# Altium PCB uOpioid - rev.B0.PcbDoc
Units mm, origin at the board's own origin, x right, y up, seen from the top; angles counter-clockwise.
Board outline 20 x 49.8 mm, 2 copper layers (Top Layer, Bottom Layer); 39 components, 38 nets, 136 pads, 78 vias.
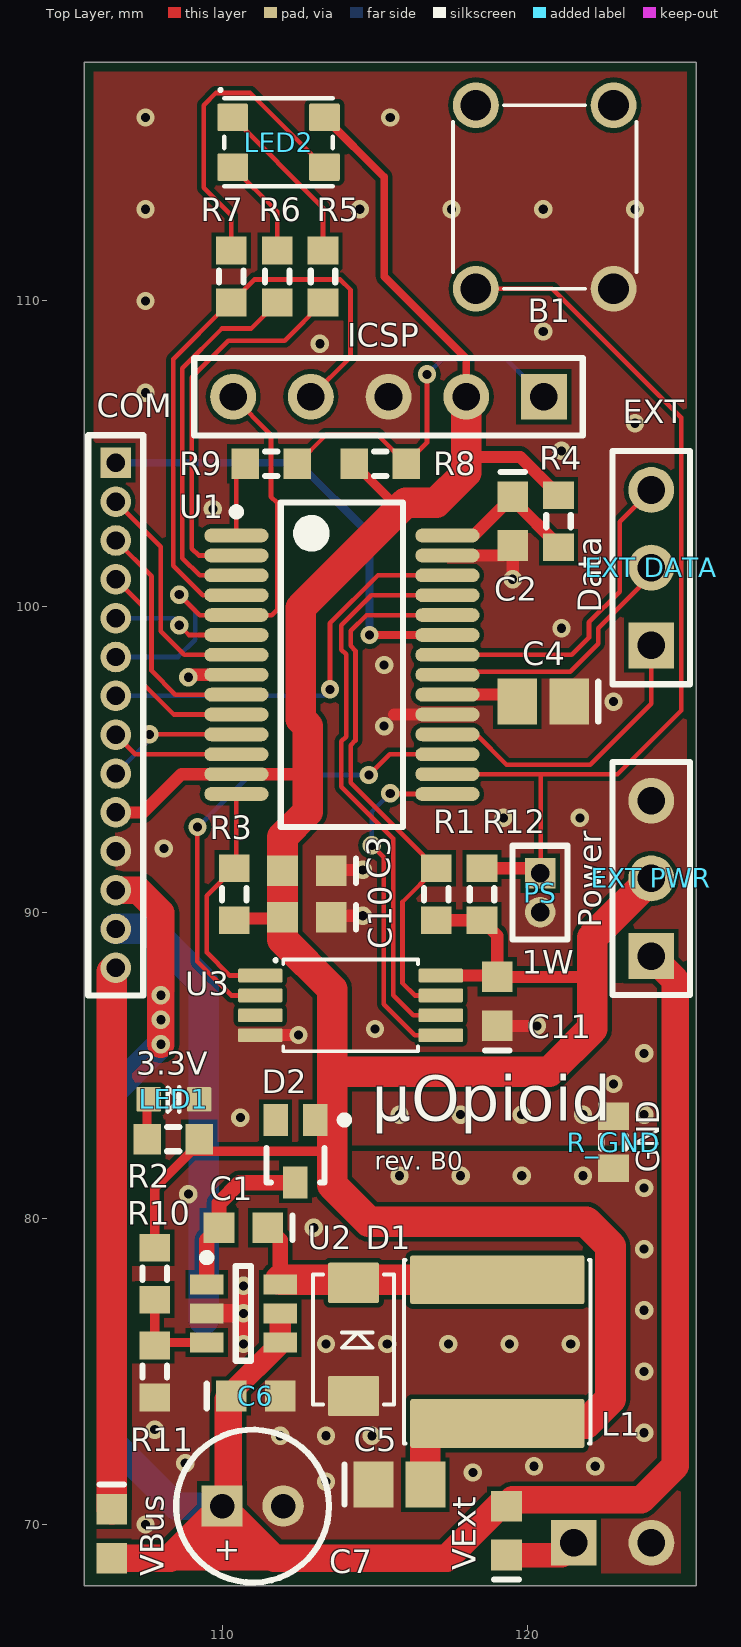
[diagram p0: Top Layer view]
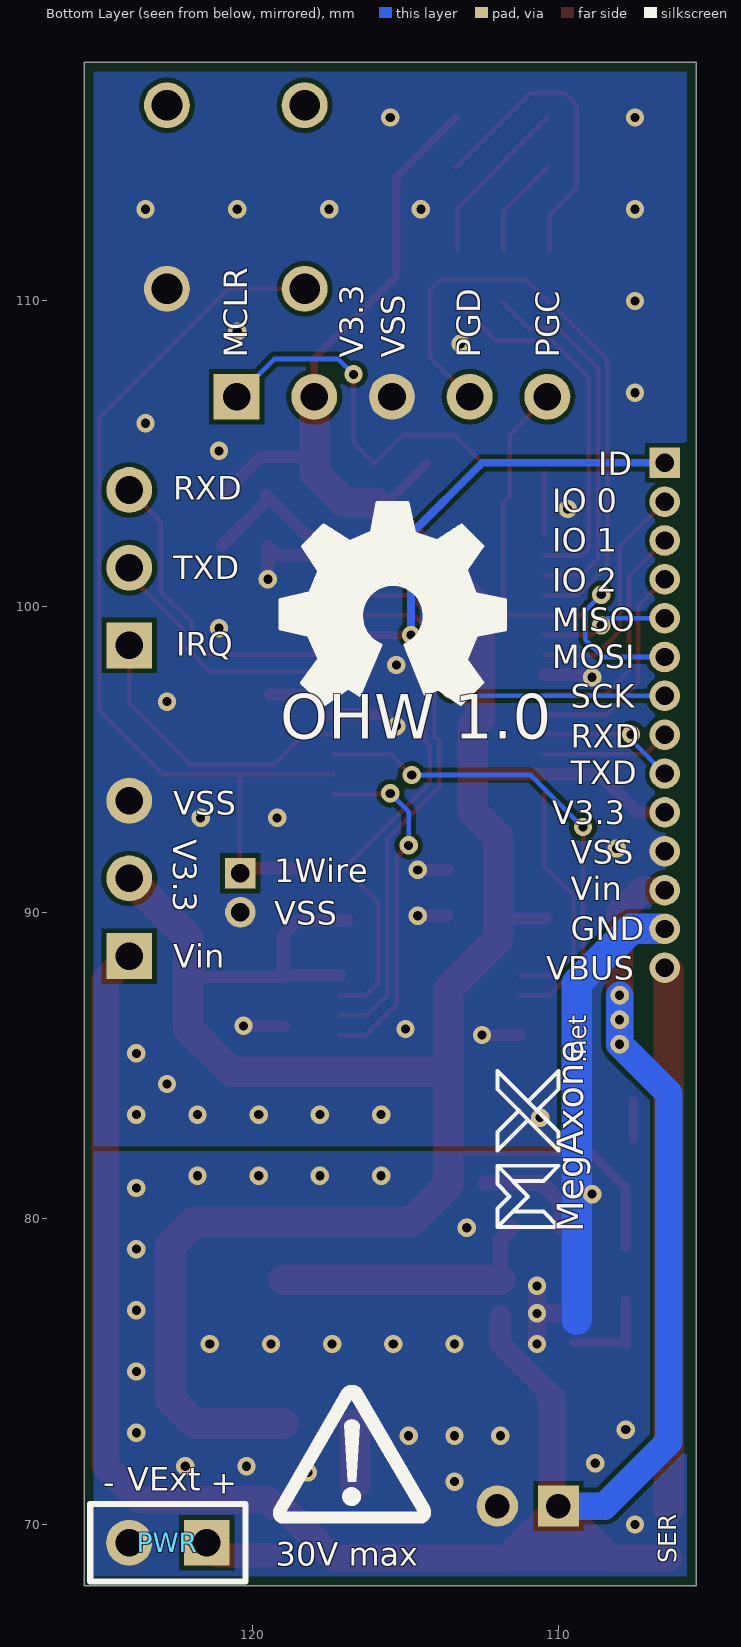
[diagram p1: Bottom Layer view, seen from below]

## Layer stack, top to bottom
Top Layer: signal copper 0.0356
Dielectric: dielectric 0.32, FR-4, Dk 4.8
Bottom Layer: signal copper 0.0356

## Board outline
105.5,68 105.5,117.8 125.5,117.8 125.5,68

## Design rules (kind name [scope] priority, off if disabled: settings)
Clearance [All] p1: gap=0.152
HoleSize [All] p1: absolutevalues=TRUE maxlimit=6.3 minlimit=0.3 maxpercent=80.000 minpercent=20.000
HoleToHoleClearance [All] p1: gap=0.152 allowstackedmicrovias=TRUE
MinimumSolderMaskSliver [All] p1: minsoldermaskwidth=0.1
PlaneClearance [All] p1: clearance=0.254
PlaneConnect [All] p1: planeconnectstyle=Relief reliefexpansion=0.508 reliefentries=4 reliefconductorwidth=0.508 reliefairgap=0.254
PolygonConnect [All] p1: connectstyle=Direct reliefconductorwidth=0.508 reliefentries=4 polygonreliefangle="90 Angle"
RoutingVias [All] p1: holewidth=0.3 width=0.6 viastyle="Through Hole" minholewidth=0.3 minwidth=0.6 maxholewidth=6.3 maxwidth=7
SilkToSilkClearance [All] p1: silktosilkclearance=0.152
SilkscreenOverComponentPads [All] p1: minsilkscreentomaskgap=0.076
SolderMaskExpansion [All] p1: expansion=0.05
Width Width_1 [All] p1: maxlimit=12.7 minlimit=0.152 preferedwidth=0.152
21 further rules are at their usual default settings.

## Components (designator, comment, footprint, x,y, rotation, side; value= is the part's Value field where it differs from the comment)
B1 "Tact Button NO" "Tact TH 4pin 6×6mm" 122.8,109.9 r90 top
C1 "100nF" CAPC1608N 110.7,79.7 r180 top
C2 "100nF" CAPC1608N 119.507,102.804 r270 top
C3 "100nF" CAPC1608N 112.776,91.374 r180 top
C4 "10µF" CAPC2012N 120.5,96.9 r180 top
C5 "10µF" CAPC2012N 115.8,71.3 r0 top
C6 "100nF" CAPC1608N 111.1,74.2 r0 top
C7 "33µF" CAPPR2-5x11 111,70.6 r0 top
C10 "1µF" CAPC1608N 112.776,89.85 r180 top
C11 "100nF" CAPC1608N 119,87.1 r90 top
COM "MHDR1X14" MHDR1X14 106.526,104.709 r270 top
D1 "Schottky Diode" DO-214AC 114.3,74.2 r270 top
D2 "Diode" SOT323 112.4,82.2 r180 top
"EXT DATA" "Header 3" HDR1X3 124.033,98.74 r90 top
"EXT PWR" "Header 3" HDR1X3 124.033,88.58 r90 top
ICSP "Header 5" HDR1X5 120.523,106.868 r180 top
L1 "15µH" "INDUCTOR 6×6mm Taiyo Yuden" 119,78 r270 top
LED1 "" "LED 1608m" 107.6,83.9 r270 top
LED2 "LED RGB common A" "LED 3528m" 110.6,114.4 r90 top
PS "MHDR1X2" MHDR1X2 120.399,91.288 r270 top
PWR "Header 2" HDR1X2 121.5,69.4 r0 bottom
R1 "150K" RESC1608N 117,90.6 r270 top
R2 "330" RESC1608N 108.4,82.6 r180 top
R3 "150K" RESC1608N 110.4,90.6 r270 top
R4 "10" RESC1608N 121,102.8 r90 top
R5 "470" RESC1608N 113.3,110.8 r270 top
R6 "330" RESC1608N 111.8,110.8 r270 top
R7 "330" RESC1608N 110.3,110.8 r270 top
R8 "150K" RESC1608N 115.17,104.682 r180 top
R9 "470" RESC1608N 111.614,104.682 r0 top
R10 "30.9K" RESC1608N 107.8,78.2 r90 top
R11 "10K" RESC1608N 107.8,75 r90 top
R12 "4.7K" RESC1608N 118.5,90.6 r270 top
R_GND "0" RESC1608N 122.8,82.5 r90 top
U1 "PIC32MX120FxxxB" SSOP28_N 113.919,98.105 r0 top
U2 "MCP16301" SOT23-6_N 110.7,76.9 r0 top
U3 "23K256" TSSOP8N_N 111.252,87.945 r270 top
VBus "150" INDC1608N 106.4,69.7 r270 top
VExt "150" INDC1608N 119.3,69.8 r90 top

## Footprints (in the part's own frame and the unit in brackets; to place one, negate y for a bottom-side part, rotate by r counter-clockwise, add the part's x,y. Pads: shape width x height; smd on the part's side, far side on the other; paste and mask are expansions set on the pad)
CAPC1608N [mm] "Chip Capacitor, Body 1.6x0.8mm, IPC Medium Density"
  rect 1x1 smd: 1(-0.8,0) 2(0.8,0)
  silkscreen extent -1.6,-0.4 -1.6,0.4, body extent -0.87,-0.48 0.87,0.48, height 0.85
CAPC2012N [mm] "Chip Capacitor, Body 2.0x1.3mm, IPC Medium Density"
  rect 1.3x1.5 smd: 1(-0.85,0) 2(0.85,0)
  silkscreen extent -1.8,-0.65 -1.8,0.65, body extent -1.1,-0.72 1.1,0.72, height 1.1
CAPPR2-5x11 [mm] "Capacitor, Electrolytic, Radial; Body 5 x 11 mm (Dia.xH typ); Pin Spacing 2 mm (typ)"
  rect 1.35x1.35 hole 0.8: 1(-1,0)
  round 1.35 hole 0.8: 2(1,0)
  silkscreen extent -2.5,-2.5 2.5,2.5
DO-214AC [mm] "DO-214AC Diode 4.25×2.65mm"
  rrect10% 1.32x1.68 smd: A(0,0) K(-3.7,0)
  silkscreen extent -3.98,-1.33 0.28,1.33, body extent -3.98,-1.33 0.28,1.33, height 2.15
HDR1X2 [mm] "Connector; Header; 2 Position"
  rect 1.5x1.5 hole 0.9: 1(0,0)
  round 1.5 hole 0.9: 2(2.54,0)
  silkscreen extent -1.27,-1.27 3.81,1.27
HDR1X3 [mm] "Connector; Header; 3 Position"
  rect 1.5x1.5 hole 0.9: 1(0,0)
  round 1.5 hole 0.9: 2(2.54,0) 3(5.08,0)
  silkscreen extent -1.27,-1.27 6.35,1.27
HDR1X5 [mm] "Connector; Header; 5 Position"
  rect 1.5x1.5 hole 0.9: 1(0,0)
  round 1.5 hole 0.9: 2(2.54,0) 3(5.08,0) 4(7.62,0) 5(10.16,0)
  silkscreen extent -1.27,-1.27 11.43,1.27
INDC1608N [mm] "Chip Inductor, Body 1.6x0.8mm, IPC Medium Density"
  rect 1x1 smd: 1(-0.8,0) 2(0.8,0)
  silkscreen extent -1.6,-0.4 -1.6,0.4, body extent -0.87,-0.48 0.87,0.48, height 0.71
"INDUCTOR 6×6mm Taiyo Yuden" [mm] "Inductor 6×6mm body Taiyo Yuden SMD Power"
  rrect10% 1.6x5.7 smd: 1(0,0) 2(4.7,0)
  silkscreen extent -0.65,-3.05 5.35,3.05, body extent -0.63,-2.99 5.35,2.99, height 2.8
"LED 1608m" [mm] "LED 1608 1.6x0.8mm"
  rrect10% 0.8x0.8 smd: 1(0,0) 2(0,1.65)
  silkscreen extent -0.4,0.62 0.4,1, body extent -0.4,0.03 0.4,1.63, height 0.75
"LED 3528m" [mm] "LED RGB 3528m common A"
  rrect10% 0.9x1 smd: 1(1.6,0.25) 2(1.6,-2.75) 3(-0.025,-2.75) 4(-0.025,0.25)
  silkscreen extent -0.65,-3.03 2.52,0.67, body extent -0.65,-3.03 2.22,0.53, height 1.9
MHDR1X2 [mm] "Connector; Header; 2 Position"
  rect 1x1 hole 0.6: 1(0,0)
  round 1 hole 0.6: 2(1.27,0)
  silkscreen extent -0.9,-0.9 2.17,0.9
MHDR1X14 [mm] "Connector; Header; 14 Position"
  rect 1x1 hole 0.6: 1(0,0)
  round 1 hole 0.6: 2(1.27,0) 3(2.54,0) 4(3.81,0) 5(5.08,0) 6(6.35,0) 7(7.62,0) 8(8.89,0) 9(10.16,0) 10(11.43,0) 11(12.7,0) 12(13.97,0) 13(15.24,0) 14(16.51,0)
  silkscreen extent -0.9,-0.9 17.41,0.9
RESC1608N [mm] "Chip Resistor, Body 1.6x0.8mm, IPC Medium Density"
  rect 0.9x1 smd: 1(-0.85,0) 2(0.85,0)
  silkscreen extent -0.2,-0.4 0.2,0.4, body extent -0.85,-0.48 0.85,0.48, height 0.6
SOT23-6_N [mm] "SOT23, 6-Leads, Body 2.9x1.6mm, Pitch 0.95mm, Lead Span 2.7mm, IPC Medium Density"
  rect 1.1x0.65 smd: 1(-1.2,0.95) 2(-1.2,0) 3(-1.2,-0.95) 4(1.2,-0.95) 5(1.2,0) 6(1.2,0.95)
  silkscreen extent -1.32,-1.55 0.25,1.95, body extent -0.9,-1.55 0.9,1.55, height 1.45
SOT323 [mm] "SOT-323/SC-70; 3 Leads; Body 2.2 x 2.2 mm, inc. leads (LxW max)"
  rect 0.8x1.05 smd: 1(-0.65,-1.025) 2(0.65,-1.025) 3(0,1.025)
  silkscreen extent -1.73,-1.15 0.95,1.03
SSOP28_N [mm] "SOP, 28-Leads, Body 10.2x5.3mm, Pitch 0.65mm, IPC Medium Density"
  oval 2.1x0.45 smd: 1(-3.45,4.225) 2(-3.45,3.575) 3(-3.45,2.925) 4(-3.45,2.275) 5(-3.45,1.625) 6(-3.45,0.975) 7(-3.45,0.325) 8(-3.45,-0.325) 9(-3.45,-0.975) 10(-3.45,-1.625) 11(-3.45,-2.275) 12(-3.45,-2.925) 13(-3.45,-3.575) 14(-3.45,-4.225) 15(3.45,-4.225) 16(3.45,-3.575) 17(3.45,-2.925) 18(3.45,-2.275) 19(3.45,-1.625) 20(3.45,-0.975) 21(3.45,-0.325) 22(3.45,0.325) 23(3.45,0.975) 24(3.45,1.625) 25(3.45,2.275) 26(3.45,2.925) 27(3.45,3.575) 28(3.45,4.225)
  silkscreen extent -3.57,-5.3 2,5.3, body extent -2.7,-5.3 2.7,5.3, height 1.99
"Tact TH 4pin 6×6mm" [mm] "Tactile push button TH 6×6mm body 4pin"
  round 1.5 hole 1: 1(0.5,0) 2(6.5,0) 3(0.5,4.5) 4(6.5,4.5)
  silkscreen extent 0.5,-0.75 6.5,5.25, body extent 0.5,-0.75 6.5,5.25, height 5.7
TSSOP8N_N [mm] "TSSOP 8pin Nominal Density Nominal 4.4×3mm"
  rrect20% 0.45x1.45 smd: 1(0,0) 2(0.65,0) 3(1.3,0) 4(1.95,0) 5(1.95,5.9) 6(1.3,5.9) 7(0.65,5.9) 8(0,5.9)
  silkscreen extent -0.53,0.48 2.47,5.15, body extent -0.53,0.75 2.47,5.15, height 1.2

## Part data
C1 C2 C3 C4 C5 C6 C10 C11: library part Capacitor
C7: library part "Capacitor Polarised"
COM: "Header, 14-Pin"
"EXT DATA" "EXT PWR": "Header, 3-Pin"
ICSP: "Header, 5-Pin"
L1 VBus VExt: library part Inductor
LED1: library part LED
PS PWR: "Header, 2-Pin"
R1 R2 R3 R4 R5 R6 R7 R8 R9 R10 R11 R12 R_GND: library part Resistor

## Via types
v1: diameter 0.6, hole 0.3, Top Layer to Bottom Layer, tented both sides, 78 vias

## Nets (pads, with @x,y where several pads share a name; then routed paths per layer and width w, separated by ;. In a path a pad name is that pad's centre, name@x,y a point inside that pad or via, vN(x,y) a via of type N, cw(c..) or ccw(c..) an arc to the next point about the centre after c; other vN are vias at no path point)
GND: C5.1 C6.2 C7.2 COM.13 D1.A PWR.2 R11.1 R_GND.1 U2.2 | length 17.7
  Top Layer w0.6: U2.2 v1(110.7,76.9) ; v1(110.7,75.9) v1(110.7,76.9) ; v1(110.7,77.8) v1(110.7,76.9)
  Bottom Layer w1: COM.13 107.631,89.469 109.4,87.7 109.4,76.7
  other v1: 107.5,70 113.4,71.4 118.2,71.7 120.2,71.9 122.2,71.9 108.8,72 111.9,72.9 113.4,72.9 114.9,72.9 123.8,73 107.8,73.1 123.8,75 113.4,75.9 115.4,75.9 117.4,75.9 119.4,75.9 121.4,75.9 123.8,77 123.8,79 113,79.7 108.9,80.8 123.8,81 115.8,81.4 117.8,81.4 119.8,81.4 121.8,81.4
NetB1_2: B1.3 PS.1 R12.1 U1.16 | length 31.5
  Top Layer w0.152: U1.16 122.93,94.53 125.012,96.612 125.012,106.188 120.8,110.4 B1.3 ; PS.1@120.424,91.288 120.424,94.53
  Top Layer w0.4: R12.1 PS.1@120.262,91.45
NetC1_1: C1.1 D1.K L1.1 U2.6 | length 9
  Top Layer w0.5: C1.1 111.9,79.3 U2.6@111.9,78
  Top Layer w1: U2.6@111.9,78 L1.1
NetC1_2: C1.2 D2.3 U2.1 | length 5.6
  Top Layer w0.5: U2.1 109.5,79.3 C1.2 109.9,80.5 110.575,81.175 D2.3
NetC2_1: C2.1 R4.1 U1.28 | length 4.9
  Top Layer w0.4: U1.28 118.233,102.33 C2.1 ; C2.1@119.557,103.654 C2.1 ; R4.1@121,102.009 119.507,103.502 C2.1
NetC4_2: C4.2 U1.20 | length 2.1
  Top Layer w0.4: U1.20 C4.2@119.42,97.13
NetCOM_1: COM.1 U1.23 | length 15.1
  Top Layer w0.254: v1(114.82,99.08) U1.23
  Bottom Layer w0.254: COM.1 112.491,104.709 114.82,102.38 v1(114.82,99.08)
NetCOM_2: COM.2 U1.7 | length 7.6
  Top Layer w0.152: COM.2 108,101.965 108,99.2 108.77,98.43 U1.7
NetCOM_3: COM.3 U1.9 | length 7.8
  Top Layer w0.152: COM.3 107.695,101 107.695,97.905 108.47,97.13 U1.9
NetCOM_4: COM.4 U1.10 | length 7.3
  Top Layer w0.152: COM.4 107.39,100.035 107.39,97.51 108.42,96.48 U1.10
NetCOM_5: COM.5 U1.6 | length 3.9
  Top Layer w0.152: v1(108.6,99.4) 108.92,99.08 U1.6
  Bottom Layer w0.152: COM.5 108.4,99.629 v1@108.4,99.6
NetCOM_6: COM.6 ICSP.5 U1.5 | length 15.6
  Top Layer w0.152: v1(108.6,100.4) 109.27,99.73 U1.5 111.63,99.73 111.8,99.9 111.8,103.4 111.6,103.6 111.6,105.631 ICSP.5
  Bottom Layer w0.152: COM.6 108.559,98.359 109.129,98.929 109.129,99.871 v1(108.6,100.4)
NetCOM_7: COM.7 U1.26 | length 13.7
  Top Layer w0.152: v1(113.529,97.3) 113.529,99.46 115.099,101.03 U1.26
  Bottom Layer w0.152: COM.7 113.318,97.089 v1(113.529,97.3)
NetCOM_8: COM.8 U1.12 | length 4.2
  Top Layer w0.152: COM.8 107.165,95.18 U1.12
NetCOM_9: COM.9 U1.11 | length 4.6
  Top Layer w0.152: v1(107.63,95.83) U1.11
  Bottom Layer w0.152: COM.9 107.63,95.653 v1(107.63,95.83)
"NetEXT DATA_1": "EXT DATA.1" U1.18 | length 9.8
  Top Layer w0.152: U1.18 118.305,95.83 119.3,94.835 122.035,94.835 124.033,96.833 124.033,98.74
"NetEXT DATA_2": "EXT DATA.2" U1.21 | length 8.6
  Top Layer w0.152: U1.21 117.468,97.879 121.379,97.879 122.3,98.8 122.3,99.3 124.033,101.033 124.033,101.28
"NetEXT DATA_3": "EXT DATA.3" U1.22 | length 10.5
  Top Layer w0.152: U1.22 121.43,98.43 121.995,98.995 121.995,99.495 123,100.5 123,102.787 124.033,103.82
NetICSP_1: ICSP.1 R8.1 R9.2 | length 12.1
  Top Layer w0.152: R9.2 113.4,105.618 115.084,105.618 R8.1 116.7,105.362 v1(116.7,107.6)
  Bottom Layer w0.152: v1(116.7,107.6) 117.2,108.1 119.291,108.1 ICSP.1
NetICSP_4: ICSP.4 R7.2 U1.4 | length 20.2
  Top Layer w0.152: R7.2@110.119,109.95 110.119,109.819 108.4,108.1 108.4,101.348 109.368,100.38 U1.4 ; R7.2 111.05,110.7 113.87,110.7 114.2,110.37 114.2,108.165 ICSP.4
NetLED1_A: LED1.1 R2.2 | length 1.2
  Top Layer w0.3: R2.2 LED1.1@107.55,83.85
NetLED2_KB: LED2.3 R7.1 | length 10.2
  Top Layer w0.152: R7.1 110.3,112.8 109.4,113.7 109.4,116.4 109.8,116.8 110.925,116.8 LED2.3
NetLED2_KG: LED2.4 R6.1 | length 3.3
  Top Layer w0.152: LED2.4 111.8,112.925 R6.1
NetLED2_KR: LED2.1 R5.1 | length 5.6
  Top Layer w0.152: LED2.1 113.3,113.05 R5.1
NetR1_1: R1.1 U1.24 U3.7 | length 18.1
  Top Layer w0.152: U3.7 116.305,87.295 115.9,87.7 115.9,90.35 R1.1 114.205,94.245 114.205,95.474 114.362,95.631 114.362,98.569 114.205,98.726 114.205,99.212 114.722,99.73 U1.24
NetR3_1: R3.1 U1.14 U3.1 | length 7.5
  Top Layer w0.152: R3.1 109.5,90.55 109.5,88.7 110.255,87.945 U3.1 ; R3.1@110.469,91.519 U1.14
NetR5_2: R5.2 U1.2 | length 12.5
  Top Layer w0.152: U1.2 109.234,101.68 109.01,101.905 109.01,107.51 110.2,108.7 112.05,108.7 R5.2
NetR6_2: R6.2 U1.3 | length 12.2
  Top Layer w0.152: U1.3 109.27,101.03 108.705,101.595 108.705,107.805 110,109.1 110.95,109.1 R6.2
NetR9_1: R9.1 U1.1 | length 2.1
  Top Layer w0.152: U1.1 R9.1@110.469,104.387
NetR10_1: R10.1 R11.2 U2.3 | length 3.1
  Top Layer w0.3: R11.2 R10.1 ; R11.2@107.9,75.95 U2.3
NetU1_15: U1.15 U3.5 | length 11.4
  Top Layer w0.152: v1(114.9,92.2) 115.29,91.81 115.29,87.01 116.305,85.995 U3.5 ; v1@115.52,93.88 U1.15
  Bottom Layer w0.152: v1(114.9,92.2) 114.9,93.3 v1(115.5,93.9)
NetU1_17: U1.17 U3.2 | length 16.1
  Top Layer w0.152: v1(109.2,92.8) 109.195,92.795 109.195,88.405 110.305,87.295 U3.2 ; v1(114.8,94.5) 115.48,95.18 U1.17
  Bottom Layer w0.152: v1(109.2,92.8) 110.9,94.5 v1(114.8,94.5)
NetU1_25: U1.25 U3.6 | length 18.6
  Top Layer w0.152: U3.6 116.255,86.645 115.595,87.305 115.595,92.424 113.9,94.119 113.9,95.6 114.057,95.757 114.057,98.443 113.9,98.6 113.9,99.4 114.88,100.38 U1.25
V3.3: "EXT PWR.2" C3.2 C5.2 C10.2 C11.2 COM.10 D2.1 ICSP.2 L1.2 LED2.2 R1.2 R2.1 R3.2 R4.2 R8.2 R10.2 R12.2 U1.13 U3.8 | length 106.5
  Top Layer w0.254: LED2.2 115.3,114.05 115.3,110.8 117.983,108.117 ICSP.2
  Top Layer w0.3: R10.2 107.8,81 109,82.2 113.6,82.2 ; R8.2 115.602,103.4
  Top Layer w0.4: COM.10 107.421,93.279 108.672,94.53 U1.13 112.73,94.53 ; R3.2@110.4,89.811 C10.2@111.589,89.811 ; R1.2@116.901,89.75 R1.2 R12.2 119,89.25 C11.2 122.1,87.9 ; U3.8 C11.2@118.955,87.945 ; 117.983,104.9 119.75,104.9 R4.2
  Top Layer w1: 113.6,84.8 120.7,84.8 122.1,86.2 122.1,89.187 124.033,91.12 ; C5.2 L1.2@116.65,73.25 ; ICSP.2 117.983,104.9 117.983,104.383 117,103.4 116,103.4 112.576,99.976 112.576,96.324 112.8,96.1 112.8,93.3 111.976,92.476 C3.2 C10.2 111.976,89.124 113.6,87.5 113.6,82.2 113.6,81.1 114.8,79.9 121.9,79.9 122.7,79.1 122.7,74.1 121.9,73.3 L1.2
VBUS: COM.14 VBus.1 | length 17.6
  Top Layer w1: VBus.1 COM.14@106.4,88.073
VEXT: PWR.1 VExt.1 | length 2.3
  Top Layer w0.8: VExt.1@119.4,69 121.1,69 PWR.1
VIN: "EXT PWR.1" C6.1 C7.1 COM.12 U2.4 U2.5 VBus.2 VExt.2 | length 70.8
  Top Layer w0.7: C6.1@110.3,74.311 111.9,75.911 U2.4 U2.5@111.9,76.8
  Top Layer w0.9: VBus.2 108.3,68.9 C7.1 ; COM.12 107.261,90.739 108,90 v1(108,87.3) v1(108,86.5) v1(108,85.7) ; C6.1 110.2,74.1 110.2,70.8 C7.1 ; 124.033,88.58 124.825,87.788 124.825,71.925 123.7,70.8 119.5,70.8 VExt.2 119.048,70.6 117.348,68.9 111.7,68.9 C7.1
  Bottom Layer w0.9: v1(108,87.3) v1(108,86.5) v1(108,85.7) 106.4,84.1 106.4,72.7 108.5,70.6 C7.1
VSS: "EXT PWR.3" B1.1 C2.2 C3.1 C4.1 C10.1 C11.1 COM.11 ICSP.3 LED1.2 PS.2 R_GND.2 U1.8 U1.19 U1.27 U3.4 | length 11.1
  Top Layer w0.4: v1@108.98,97.78 U1.8 ; U3.4@111.257,86 v1(112.5,86) ; C3.1@113.602,91.4 v1(114.6,91.4) ; C10.1@113.626,89.9 v1(114.6,89.9) ; 115.62,96.48 U1.19 ; U1.27 119.183,101.68 C2.2 v1@119.507,100.907 ; C11.1 v1(120.3,86.3)
  other v1: 110.6,83.3 115.8,83.4 117.8,83.4 119.8,83.4 121.8,83.4 123.8,83.4 122.8,84.4 123.8,85.4 115,86.2 108.1,92.1 119.2,93.1 121.7,93.1 115.3,96.1 122.8,96.9 108.9,97.7 115.3,98.1 121.1,99.3 119.5,100.9 109.7,103.2 121.1,105.1 123.5,106 107.5,107 113.2,108.6 120.5,109 107.5,110 107.5,113 114.5,113 117.5,113 120.5,113 123.5,113 107.5,116 115.5,116
pads on no net: B1.2 B1.4 D2.2 U3.3

## Polygon pours and split planes (outlines as drawn)
VSS on Top Layer "Top Layer-No Net" (solid, remove dead copper, pour order 17): 114.8,94.5 114.2,94.5 114.205,94.505 114.205,99.212 114.722,99.73 117.369,99.73 117.369,101.68 117.489,101.8 119.6,101.8 119.6,102.4 119.609,102.409 120.6,102.409 120.6,102.35 121,101.95 121.05,102 125.2,102 125.2,96.458 124.572,95.83 122.93,94.53
VSS on Top Layer "Top Layer-No Net" (solid, remove dead copper, pour order 19): 106.526,104.574 105.8,105.3 105.8,117.5 125.2,117.5 125.2,102 106.695,102 106.526,102.169
VSS on Top Layer "Top Layer-No Net" (solid, remove dead copper, pour order 11): 107.8,78.5 107.8,81 109,82.2 113.6,82.2 113.6,87.5 111.976,89.124 111.976,92.476 112.8,93.3 112.73,93.37 112.73,94.53 108.672,94.53 107.421,93.279 106.526,93.279 106.5,91.4 108,85.7 106.8,84.5 106.526,78.574 106.6,78.5
VSS on Top Layer "Top Layer-No Net" (solid, remove dead copper, pour order 15): 117.152,87.295 116.305,87.295 115.9,87.7 115.9,90.35 117,91.45 114.205,94.245 114.205,94.5 114.8,94.5 115.48,95.18 117.369,95.18 117.369,95.83 123.03,95.83 124.033,96.833 124.033,98.74 125.16,98.74 125.2,98.6 125.2,87.6
VSS on Top Layer "Top Layer-No Net" (solid, remove dead copper, pour order 13): 113.6,85.1 113.6,87.5 111.976,89.124 111.976,92.476 112.9,93.4 112.9,97.3 114.2,97.3 114.205,94.245 116.65,91.8 116.65,91.1 115.9,90.35 115.9,87.7 116.305,87.295 116.31,87.3 117.8,87.3 117.8,87.945 117.845,87.9 122.1,87.9 122.1,86.2 120.9,85
VSS on Top Layer "Top Layer-No Net" (solid, remove dead copper, pour order 9): 114,82.4 114,84.5 120.9,84.5 122.5,86.1 122.5,87.7 124.9,87.713 124.9,82.4
GND on Top Layer "Top Layer-No Net" (solid, remove dead copper, pour order 4): 105.9,82.2 105.9,68.4 125,68.4 125,82.2
VSS on Bottom Layer "Top Layer-No Net" (solid, remove dead copper, pour order 7): 110,82.3 110,87.5 107.7,89.9 106.5,89.9 106.5,104.683 106.526,104.709 105.8,105.435 105.8,117.5 125.2,117.5 125.2,82.3
GND on Bottom Layer "Top Layer-No Net" (solid, remove dead copper, pour order 2): 105.8,68.3 125.2,68.3 125.2,82.2 109,82.2 109,88 108.3,88.1 108.6,87.3 108.3,87.3 106.5,84.3 105.8,82.2

## Other copper
Top Layer:
  rectangle net VIN: 108.4,68.5 111.8,69.1
  rectangle net VIN: 109.1,69.1 110.9,70

## Silkscreen, mask and mechanical layers (free items; w line width, h text height)
Top Overlay:
  text "EXT" at 123.1,106 h0.76
  text "Data" at 122.4,99.8 h0.76 r90
  text "Power" at 122.4,89.5 h0.75 r90
  text "1W" at 119.8,88 h0.76
  text "3.3V" at 107.2,84.7 h0.75
  text "µOpioid" at 114.9,82.7 h2.54
  text "GND" at 124.3,81.5 h0.75 r90
  text "rev. B0" at 115,81.4 h1
Bottom Overlay:
  drawing of 965 lines, arcs and shapes, not listed
  text "PGC" at 109.975,108.15 h0.76 r270
  text "PGD" at 112.55,108.15 h0.76 r270
  text "VSS" at 115.025,108.15 h0.76 r270
  text "V3.3" at 116.375,108.15 h0.76 r270
  text "MCLR" at 120.175,108.15 h0.76 r270
  text "ID" at 108.7,104.3 h0.76
  text "RXD" at 122.6,103.5 h0.76
  text "IO 0" at 110.2,103.1 h0.76
  text "IO 1" at 110.2,101.8 h0.76
  text "TXD" at 122.6,100.9 h0.76
  text "IO 2" at 110.2,100.5 h0.76
  text "MISO" at 110.2,99.2 h0.76
  text "IRQ" at 122.5,98.4 h0.76
  text "MOSI" at 110.2,98 h0.76
  text "SCK" at 109.6,96.7 h0.76
  text "RXD" at 109.6,95.4 h0.76
  text "OHW 1.0" at 119.1,95.2 h2.5
  text "TXD" at 109.6,94.2 h0.76
  text "VSS" at 122.6,93.2 h0.76
  text "V3.3" at 110.2,92.9 h0.76
  text "V3.3" at 122.6,92.4 h0.76 r90
  text "VSS" at 109.6,91.6 h0.76
  text "1Wire" at 119.3,91 h0.76
  text "Vin" at 109.6,90.4 h0.76
  text "VSS" at 119.3,89.6 h0.76
  text "GND" at 109.6,89.1 h0.76
  text "Vin" at 122.6,88.2 h0.76
  text "VBUS" at 110.4,87.8 h0.76
  text ".net" at 108.896,85.077 h1 r270
  text "MegAxone" at 108.896,79.552 h1.5 r270
  text "VExt" at 124.1,71.1 h0.76
  text "+" at 120.5,71 h0.76
  text "-" at 124.5,71 h0.76
  text "SER" at 105.95,68.725 h1.02 r270
  text "30V max" at 119.25,68.65 h0.76
Mechanical 1:
  the board outline again, w0.1

## Dimensions
105.5,117.8 to 125.5,117.8 on Mechanical 1
105.5,117.8 to 105.5,68 on Mechanical 1
105.5,117.8 to 106.526,104.709 on Mechanical 1
106.526,88.199 to 105.5,68 on Mechanical 1
121.5,69.4 to 125.5,68 on Mechanical 1
124.033,103.82 to 125.5,117.8 on Mechanical 1
124.033,93.66 to 124.033,103.82 on Mechanical 1
110.363,106.868 to 105.5,117.8 on Mechanical 1
110.363,106.868 to 105.5,117.8 on Mechanical 1
122.8,110.4 to 125.5,117.8 on Mechanical 1
118.3,116.4 to 125.5,117.8 on Mechanical 1
125.5,68 to 124.04,69.4 on Mechanical 1
120.399,91.288 to 124.033,93.66 on Mechanical 1
120.399,90.018 to 125.5,68 on Mechanical 1
105.5,117.8 to 111.85,115.187 on Mechanical 1
111.85,115.187 to 105.5,117.8 on Mechanical 1

## Text inside footprints (layer, text, board x,y; h text height)
C7: Top Overlay "+" at 109.73,68.822 h0.76